# EAGLE board minimumSystem (EAGLE 9.6.2)
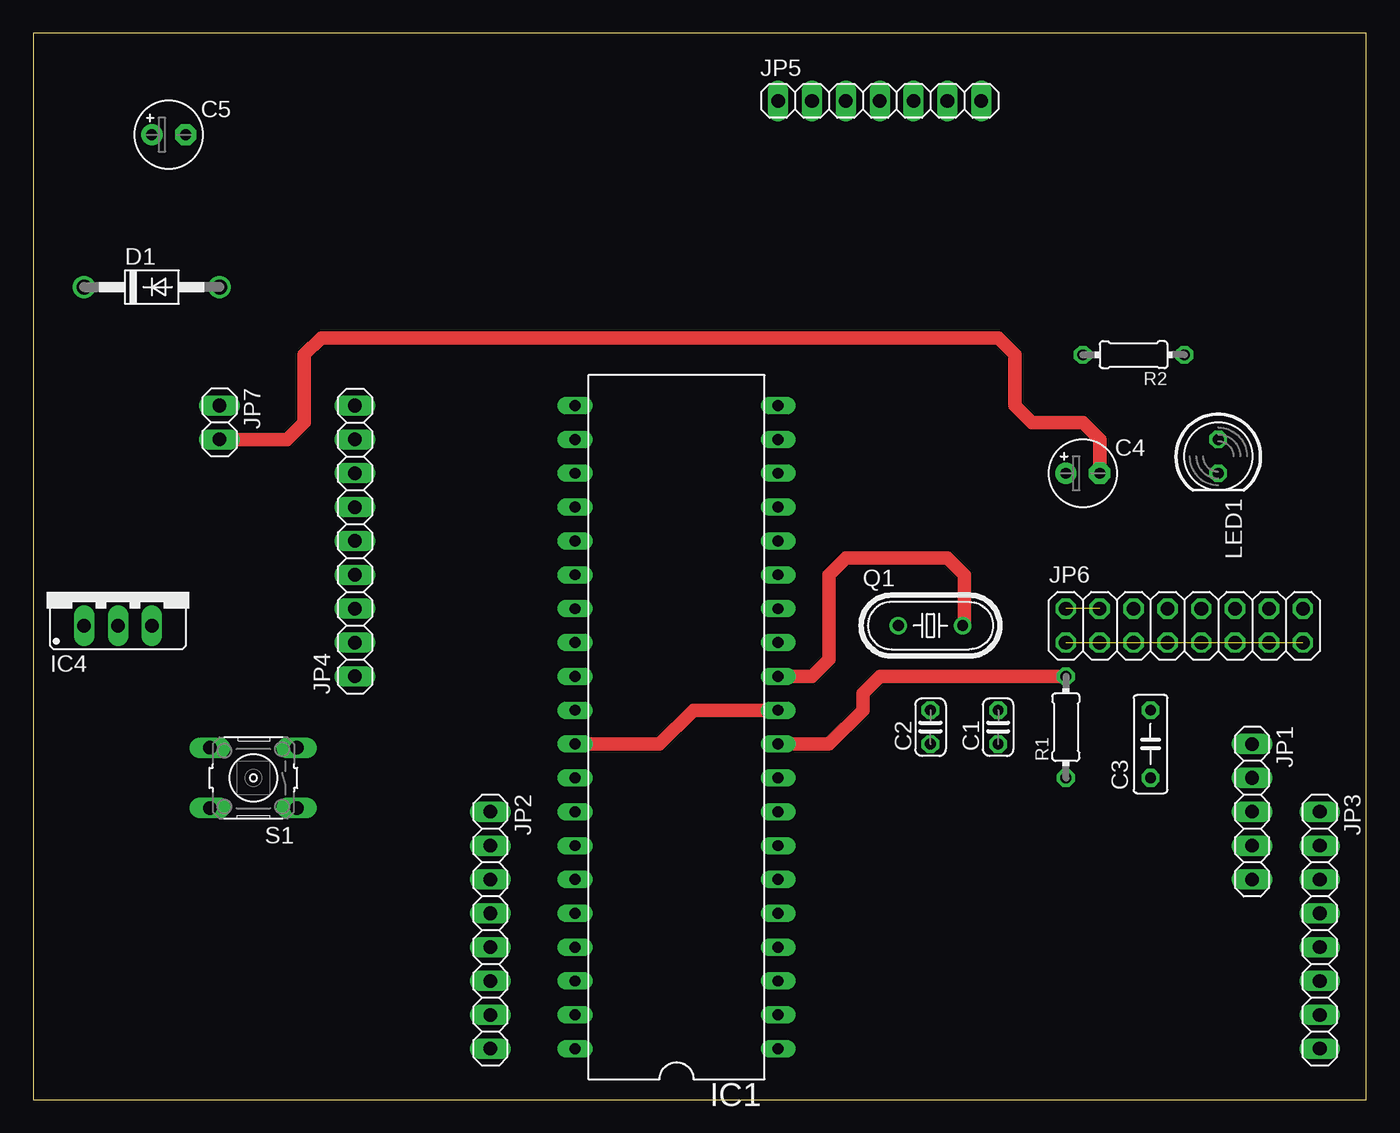
[diagram p0: board, top side]
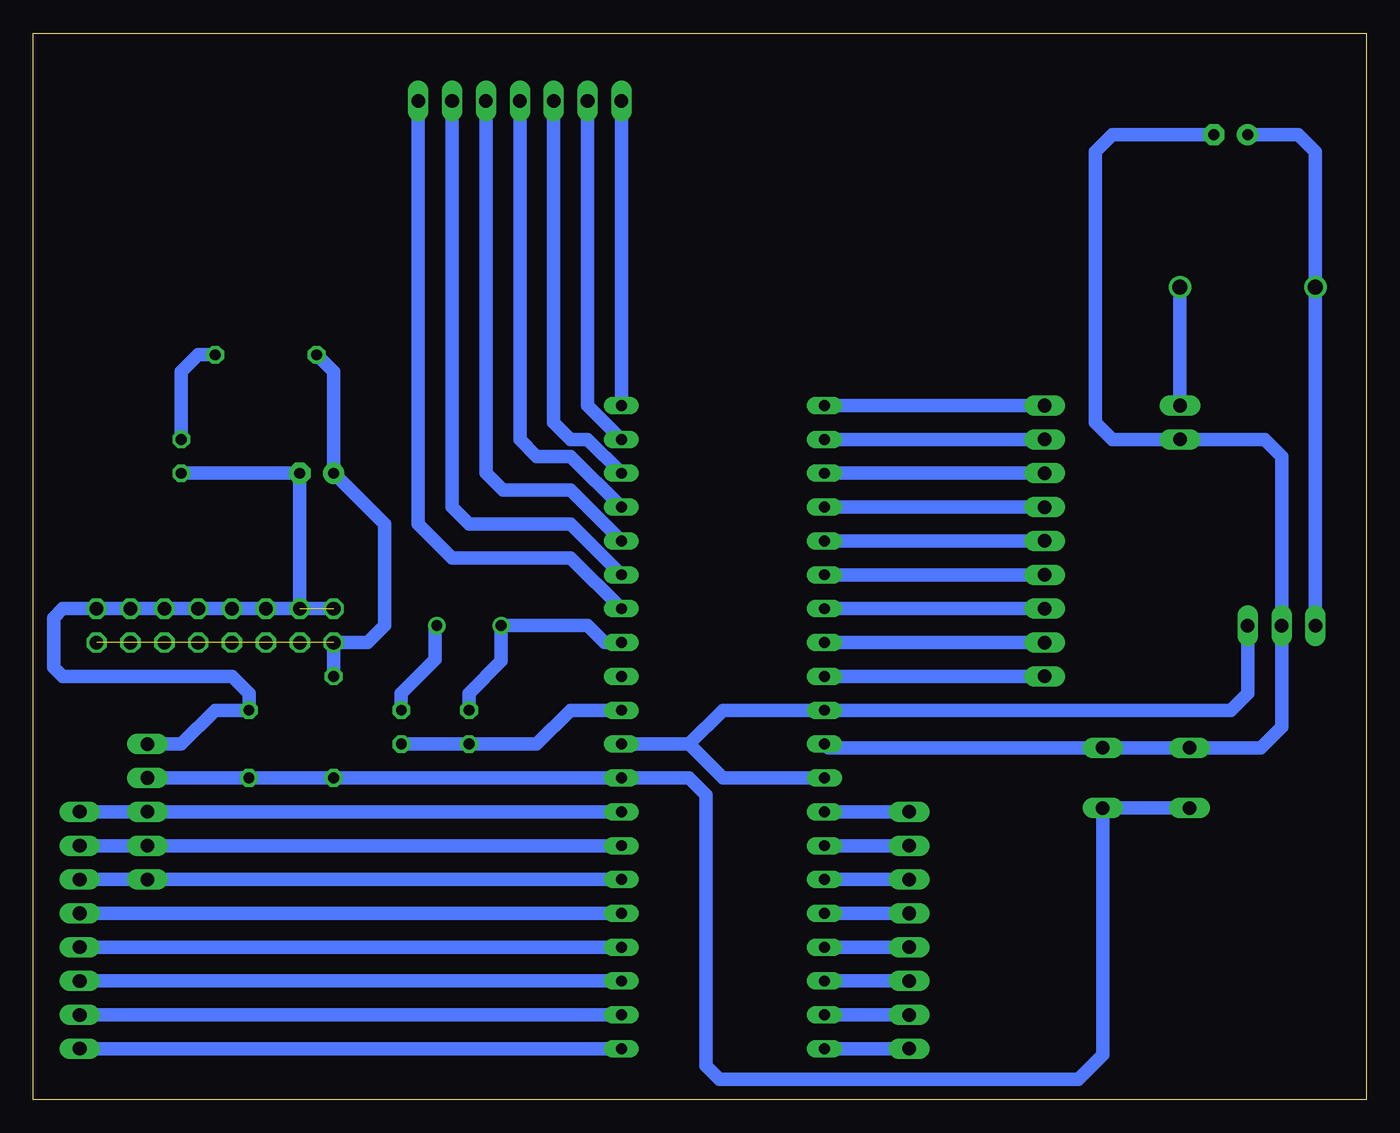
[diagram p1: board, bottom side, seen from below]

Size 100 x 80 mm. Coordinates in mm from the lower left corner, seen from the top.
Outline: 0,0 100,0 100,80 0,80 0,0
Copper layers (1*16): Top 0.035mm / dielectric 1.5mm / Bottom 0.035mm
Design rules "default": minimum track width 6mil, minimum drill 0.35mm, track to track 6mil, track to pad 6mil, pad to pad 6mil, via to via 6mil, smd to smd 6mil, copper to edge 40mil, drill to drill 6mil, minimum pad ring 10mil, minimum via ring 8mil, stop-mask expansion 4mil, vias tented up to drill 0mil, thermal gap 10mil

## Footprints (pad centres in the part's own frame; a part is rotated, then mirrored left to right if it is on the bottom)
C025-024X044 = drill 0.813 octagon: 1 -1.27,0; 2 1.27,0
C050-025X075 = drill 0.813 octagon: 1 -2.54,0; 2 2.54,0
E2,5-5 = drill 0.813 pad 1.6: + -1.27,0 | drill 0.813 pad 1.6 octagon: - 1.27,0
DO41-10 = drill 1.118: A 5.08,0; C -5.08,0
DIL40 = drill 0.813 long: 1 -24.13,-7.62; 2 -21.59,-7.62; 3 -19.05,-7.62; 4 -16.51,-7.62; 5 -13.97,-7.62; 6 -11.43,-7.62; 7 -8.89,-7.62; 8 -6.35,-7.62; 9 -3.81,-7.62; 10 -1.27,-7.62; 11 1.27,-7.62; 12 3.81,-7.62; 13 6.35,-7.62; 14 8.89,-7.62; 15 11.43,-7.62; 16 13.97,-7.62; 17 16.51,-7.62; 18 19.05,-7.62; 19 21.59,-7.62; 20 24.13,-7.62; 21 24.13,7.62; 22 21.59,7.62; 23 19.05,7.62; 24 16.51,7.62; 25 13.97,7.62; 26 11.43,7.62; 27 8.89,7.62; 28 6.35,7.62; 29 3.81,7.62; 30 1.27,7.62; 31 -1.27,7.62; 32 -3.81,7.62; 33 -6.35,7.62; 34 -8.89,7.62; 35 -11.43,7.62; 36 -13.97,7.62; 37 -16.51,7.62; 38 -19.05,7.62; 39 -21.59,7.62; 40 -24.13,7.62
78XXS = drill 1.016 long: GND 0,-2.54; IN -2.54,-2.54; OUT 2.54,-2.54
1X05 = drill 1.016 long: 1 -5.08,0; 2 -2.54,0; 3 0,0; 4 2.54,0; 5 5.08,0
1X08 = drill 1.016 long: 1 -8.89,0; 2 -6.35,0; 3 -3.81,0; 4 -1.27,0; 5 1.27,0; 6 3.81,0; 7 6.35,0; 8 8.89,0
1X09 = drill 1.016 long: 1 -10.16,0; 2 -7.62,0; 3 -5.08,0; 4 -2.54,0; 5 0,0; 6 2.54,0; 7 5.08,0; 8 7.62,0; 9 10.16,0
1X07 = drill 1.016 long: 1 -7.62,0; 2 -5.08,0; 3 -2.54,0; 4 0,0; 5 2.54,0; 6 5.08,0; 7 7.62,0
2X08 = drill 1.016 octagon: 1 -8.89,-1.27; 2 -8.89,1.27; 3 -6.35,-1.27; 4 -6.35,1.27; 5 -3.81,-1.27; 6 -3.81,1.27; 7 -1.27,-1.27; 8 -1.27,1.27; 9 1.27,-1.27; 10 1.27,1.27; 11 3.81,-1.27; 12 3.81,1.27; 13 6.35,-1.27; 14 6.35,1.27; 15 8.89,-1.27; 16 8.89,1.27
1X02 = drill 1.016 long: 1 -1.27,0; 2 1.27,0
LED5MM = drill 0.813 octagon: A -1.27,0; K 1.27,0
HC49U-V = drill 0.813: 1 -2.413,0; 2 2.413,0
0204/7 = drill 0.813 octagon: 1 -3.81,0; 2 3.81,0
B3F-10XX = drill 1.016 long: 1 -3.251,2.261; 2 3.251,2.261; 3 -3.251,-2.261; 4 3.251,-2.261

## Placement (x,y rotation side)
C1  [C025-024X044]  72.39,27.94 90 top
C2  [C025-024X044]  67.31,27.94 90 top
C3  [C050-025X075]  83.82,26.67 90 top
C4  [E2,5-5]  78.74,46.99 0 top
C5  [E2,5-5]  10.16,72.39 0 top
D1  1N4004  [DO41-10]  8.89,60.96 0 top
IC1  MEGA16-P  [DIL40]  48.26,27.94 90 top
IC4  [78XXS]  6.35,38.1 0 top
JP1  [1X05]  91.44,21.59 270 top
JP2  [1X08]  34.29,12.7 270 top
JP3  [1X08]  96.52,12.7 270 top
JP4  [1X09]  24.13,41.91 90 top
JP5  [1X07]  63.5,74.93 0 top
JP6  [2X08]  86.36,35.56 0 top
JP7  [1X02]  13.97,50.8 270 top
LED1  [LED5MM]  88.9,48.26 270 top
Q1  [HC49U-V]  67.31,35.56 0 top
R1  [0204/7]  77.47,27.94 90 top
R2  [0204/7]  82.55,55.88 180 top
S1  [B3F-10XX]  16.51,24.13 180 top

## Library data of the parts
C1 C2 C4 C5 R1 R2 = rcl
C3 = resistor
D1 = diode
IC1 = atmel; MPN: ATMEGA16-16PU; OC_FARNELL: 9171142; OC_NEWARK: 01M6885
IC4 = v-reg
JP1-JP7 = pinhead
LED1 = led
Q1 = crystal; OC_FARNELL: 1666969; OC_NEWARK: unknown
S1 = switch-omron; MPN: B3F-1000; OC_FARNELL: 176432; OC_NEWARK: 36M3542

## Nets
+5V: C4.+ IC1.10 IC1.30 IC1.32 IC4.OUT JP6.1 JP6.3 JP6.5 JP6.7 JP6.9 JP6.11 JP6.13 JP6.15 R1.2 R2.2
+12V: D1.A JP7.1
C0: IC1.22 JP4.8
C1: IC1.23 JP4.7
C2: IC1.24 JP4.6
C3: IC1.25 JP4.5
D7: IC1.14 JP5.7
GND: C1.1 C2.1 C3.2 C4.- C5.- IC1.11 IC1.31 IC4.GND JP1.1 JP6.2 JP6.4 JP6.6 JP6.8 JP6.10 JP6.12 JP6.14 JP6.16 JP7.2 LED1.K S1.3 S1.4
N$1: IC1.33 JP2.1
N$2: IC1.34 JP2.2
N$3: IC1.35 JP2.3
N$4: IC1.36 JP2.4
N$5: IC1.37 JP2.5
N$6: IC1.38 JP2.6
N$7: IC1.39 JP2.7
N$8: IC1.40 JP2.8
N$11: IC1.29 JP4.1
N$12: IC1.28 JP4.2
N$13: IC1.27 JP4.3
N$14: IC1.5 JP3.4
N$15: IC1.20 JP5.1
N$16: IC1.19 JP5.2
N$19: IC1.26 JP4.4
N$20: IC1.6 JP1.5 JP3.3
N$21: IC1.4 JP3.5
N$22: IC1.3 JP3.6
N$23: IC1.2 JP3.7
N$24: IC1.1 JP3.8
N$25: C5.+ D1.C IC4.IN
N$30: IC1.15 JP5.6
N$31: IC1.16 JP5.5
N$32: IC1.17 JP5.4
N$33: C3.1 IC1.9 JP1.2 R1.1 S1.1 S1.2
N$34: IC1.18 JP5.3
N$35: C1.2 IC1.12 Q1.2
N$36: C2.2 IC1.13 Q1.1
N$37: LED1.A R2.1
N$46: IC1.8 JP1.3 JP3.1
N$47: IC1.7 JP1.4 JP3.2
RS: IC1.21 JP4.9

## Tracks (layer width: path | path; a pad name or v marks a point on that pad's centre or on a via)
+5V  (7 unrouted)
  Top 1.016: IC1.10 59.69,26.67 62.23,29.21 62.23,30.48 63.5,31.75 R1.2
  Bottom 1.016: R2.2 77.47,54.61 C4.+ 73.66,43.18 73.66,35.56 74.93,34.29 JP6.1 R1.2 | IC4.OUT 8.89,30.48 10.16,29.21 IC1.30 48.26,29.21 50.8,26.67 | IC1.32 48.26,24.13 50.8,26.67 | 50.8,26.67 IC1.10
+12V
  Bottom 1.016: D1.A JP7.1
C0
  Bottom 1.016: JP4.8 IC1.22
C1
  Bottom 1.016: IC1.23 JP4.7
C2
  Bottom 1.016: JP4.6 IC1.24
C3
  Bottom 1.016: IC1.25 JP4.5
D7
  Bottom 1.016: JP5.7 71.12,43.18 68.58,40.64 59.69,40.64 IC1.14
GND  (1 unrouted)
  Top 1.016: IC1.31 46.99,26.67 49.53,29.21 IC1.11 | JP7.2 19.05,49.53 20.32,50.8 20.32,55.88 21.59,57.15 72.39,57.15 73.66,55.88 73.66,52.07 74.93,50.8 78.74,50.8 80.01,49.53 C4.-
  Bottom 1.016: LED1.K C4.- JP6.4 | IC1.11 59.69,29.21 62.23,26.67 C2.1 C1.1 | JP6.2 JP6.6 JP6.8 JP6.10 JP6.12 JP6.14 JP6.16 97.79,36.83 98.48,36.14 98.48,32.44 97.79,31.75 85.09,31.75 83.82,30.48 C3.2 86.36,29.21 88.9,26.67 JP1.1 | C5.- 19.05,72.39 20.32,71.12 20.32,50.8 19.05,49.53 JP7.2 7.62,49.53 6.35,48.26 IC4.GND 6.35,27.94 7.9,26.39 S1.4 S1.3 40.36,26.39 IC1.31
N$1
  Bottom 1.016: JP2.1 IC1.33
N$2
  Bottom 1.016: IC1.34 JP2.2
N$3
  Bottom 1.016: JP2.3 IC1.35
N$4
  Bottom 1.016: IC1.36 JP2.4
N$5
  Bottom 1.016: JP2.5 IC1.37
N$6
  Bottom 1.016: IC1.38 JP2.6
N$7
  Bottom 1.016: JP2.7 IC1.39
N$8
  Bottom 1.016: IC1.40 JP2.8
N$11
  Bottom 1.016: JP4.1 IC1.29
N$12
  Bottom 1.016: IC1.28 JP4.2
N$13
  Bottom 1.016: IC1.27 JP4.3
N$14
  Bottom 1.016: JP3.4 IC1.5
N$15
  Bottom 1.016: IC1.20 JP5.1
N$16
  Bottom 1.016: IC1.19 58.42,52.07 JP5.2
N$19
  Bottom 1.016: JP4.4 IC1.26
N$20
  Bottom 1.016: IC1.6 JP1.5 JP3.3
N$21
  Bottom 1.016: JP3.5 IC1.4
N$22
  Bottom 1.016: JP3.6 IC1.3
N$23
  Bottom 1.016: IC1.2 JP3.7
N$24
  Bottom 1.016: JP3.8 IC1.1
N$25
  Bottom 1.016: C5.+ 5.08,72.39 3.81,71.12 D1.C IC4.IN
N$30
  Bottom 1.016: JP5.6 68.58,44.45 67.31,43.18 59.69,43.18 IC1.15
N$31
  Bottom 1.016: IC1.16 59.69,45.72 64.77,45.72 66.04,46.99 JP5.5
N$32
  Bottom 1.016: IC1.17 59.69,48.26 62.23,48.26 63.5,49.53 JP5.4
N$33
  Bottom 1.016: JP1.2 C3.1 R1.1 IC1.9 50.8,24.13 49.53,22.86 49.53,2.54 48.51,1.52 21.59,1.52 19.76,3.35 S1.1 S1.2
N$34
  Bottom 1.016: IC1.18 58.42,49.53 59.69,49.53 60.96,50.8 JP5.3
N$35
  Top 1.016: IC1.12 58.42,31.75 59.69,33.02 59.69,39.37 60.96,40.64 68.58,40.64 69.85,39.37 69.85,35.56 Q1.2
  Bottom 1.016: Q1.2 69.85,35.43 69.85,33.02 72.39,30.48 C1.2
N$36
  Bottom 1.016: IC1.13 57.15,34.29 58.42,35.56 Q1.1 64.9,32.89 67.31,30.48 C2.2
N$37
  Bottom 1.016: R2.1 87.63,55.88 88.9,54.61 LED1.A
N$46
  Bottom 1.016: IC1.8 JP1.3 JP3.1
N$47
  Bottom 1.016: JP3.2 JP1.4 IC1.7
RS
  Bottom 1.016: IC1.21 JP4.9